# Altium PCB PCB1_8.5_short - Assm.PcbDoc
Units mm, origin at the board's own origin, x right, y up, seen from the top; angles counter-clockwise.
Board outline 3.5 x 25.31 mm, 4 copper layers (Top Layer, fs, Layer 2, Bottom Layer), stack 0.603 mm thick; 6 components, 4 nets, 24 pads, 21 vias.
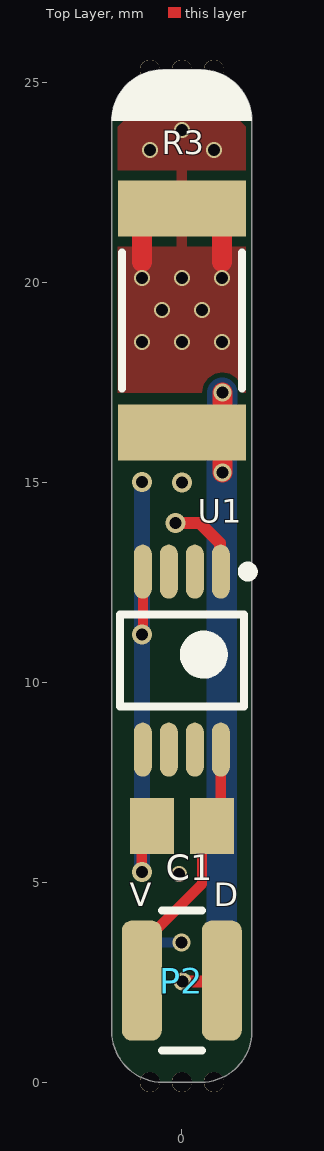
[diagram p0: Top Layer view]
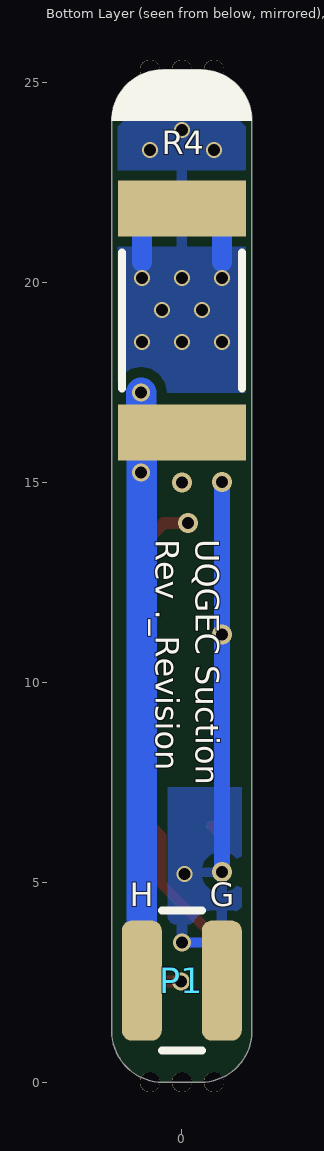
[diagram p1: Bottom Layer view, seen from below]
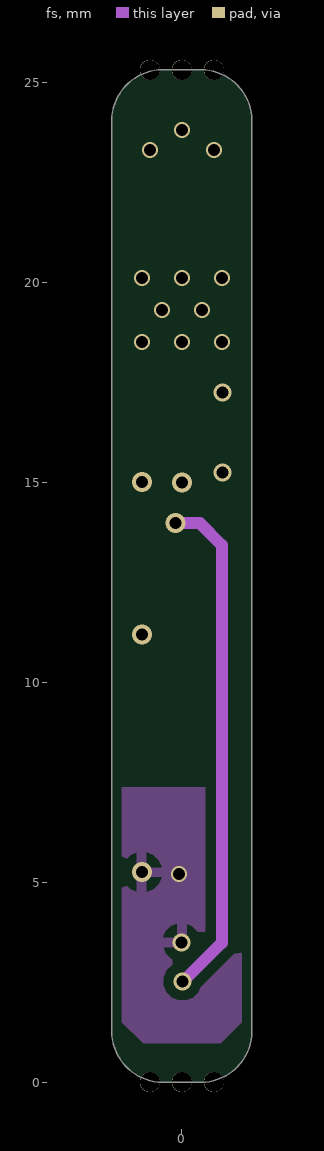
[diagram p2: fs]
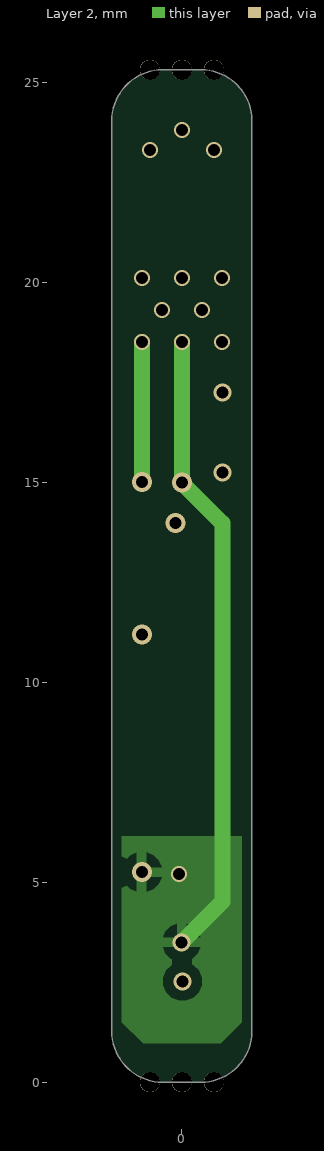
[diagram p3: Layer 2]

## Layer stack, top to bottom
Top Solder: solder mask 0.0102, Solder Resist, Dk 3.5
Top Layer: signal copper 0.0356
Dielectric 2: prepreg 0.0711, PP-006, Dk 4.1
fs: signal copper 0.035
Dielectric 1: dielectric 0.32, FR-4, Dk 4.8
Layer 2: signal copper 0.035
Dielectric 3: prepreg 0.0711, PP-006, Dk 4.1
Bottom Layer: signal copper 0.0356
Bottom Solder: solder mask 0.0102, Solder Resist, Dk 3.5

## Board outline
-0.48,0 cw(c-0.48,1.27) -1.75,1.27 -1.75,24.04 cw(c-0.48,24.04) -0.48,25.31 0.48,25.31 cw(c0.48,24.04) 1.75,24.04 1.75,1.27 cw(c0.48,1.27) 0.48,0

## Design rules (kind name [scope] priority, off if disabled: settings)
Clearance [All] p1: gap=0.254 ignorepadtopadclearanceinfootprint=FALSE except(0: Arc-Hole Track-Hole SMDPad-Hole THPad-Hole Via-Hole Fill-Hole Poly-Hole Region-Hole Text-Hole)
PolygonConnect [All] p1: connectstyle=Relief reliefconductorwidth=0.254 reliefentries=4 polygonreliefangle="90 Angle" airgapwidth=0.254
RoutingVias [All] p1: holewidth=0.711 width=1.27 viastyle="Through Hole" minholewidth=0.711 minwidth=1.27 maxholewidth=0.711 maxwidth=1.27
SolderMaskExpansion [All] p1: expansion=0.102 istentingtop=FALSE
Width [All] p1: maxlimit=0.5 minlimit=0.254 preferedwidth=0.254
30 further rules are at their usual default settings.

## Components (designator, comment, footprint, x,y, rotation, side; value= is the part's Value field where it differs from the comment)
C1 "1u" C0805 0.003,6.4 r0 top
P1 "Header 2" HDR1X2-SMT 0,2.54 r0 bottom
P2 "Header 2" HDR1X2-SMT 0,2.54 r0 top
R3 "15" RES-2512-6332 0,19.04 r90 top
R4 "15" RES-2512-6332 0,19.04 r90 bottom
U1 "DS18B20U" MSSOP-8 0,10.54 r270 top

## Footprints (in the part's own frame and the unit in brackets; to place one, negate y for a bottom-side part, rotate by r counter-clockwise, add the part's x,y. Pads: shape width x height; smd on the part's side, far side on the other; paste and mask are expansions set on the pad)
C0805 [mm] "Chip Capacitor, Body 2.0x1.3mm, IPC High Density"
  rect 1.1x1.4 smd: 1(-0.75,0) 2(0.75,0)
  body extent -1.1,-0.72 1.1,0.72, height 1.4
HDR1X2-SMT [mm] "Connector; Header; 2 Position"
  rrect50% 1x3 smd: 1(-1,0) 2(1,0)
  silkscreen extent -0.5,-1.75 0.5,1.75
MSSOP-8 [mm] "TSOP, 8-Leads, Body 3.00x3.00mm, Pitch 0.65mm, IPC Medium Density"
  oval 1.35x0.45 smd: 1(-2.225,0.975) 2(-2.225,0.325) 3(-2.225,-0.325) 4(-2.225,-0.975) 5(2.225,-0.975) 6(2.225,-0.325) 7(2.225,0.325) 8(2.225,0.975)
  silkscreen extent -2.35,-1.55 1.15,1.78, body extent -2.45,-1.55 2.45,1.55, height 1.1
RES-2512-6332 [mm]
  rect 1.4x3.2 smd: 1(-2.8,0) 2(2.8,0)
  silkscreen extent -1.7,-1.5 1.7,1.5, body extent -3.15,-1.6 3.15,1.6, height 0.6

## Part data
C1: library part Cap, "Capacitor", Link=https://au.mouser.com/ProductDetail/Vishay-Vitramon/VJ1206Y105MXJTW1BC?qs=sGAEpiMZZMs0AnBnWHyRQHefeAIkSpb%2FMIV0RdtEp0g%3D
P1 P2: "Header, 2-Pin", LatestRevisionDate=17-Jul-2002, LatestRevisionNote="Re-released for DXP Platform.", Publisher="Altium Limited"
R3 R4: library part Res3, "Resistor", Link=https://au.mouser.com/ProductDetail/Bourns/CRM2010-FX-51R0ELF?qs=%2FxfeZyN5VBcgDrGLY%2FOOpg%3D%3D, PackageReference=R2512
U1: "Programmable Resolution 1-Wire Digital Thermometer", Link=https://au.mouser.com/ProductDetail/Maxim-Integrated/DS18B20U%2bTR?qs=sGAEpiMZZMvbyeSUH4qH%2FCjwslw0Uk0S

## Free pads (board coordinates)
  round 0.5 hole 0.5 unplated mask+0: 65(-0.8,0) 66(0,0) 67(0.8,0) 68(-0.8,25.31) 69(0,25.31) 70(0.8,25.31)

## Via types
v1: diameter 0.4/0.4/0.4/0.4 (per signal layer), hole 0.3, Top Layer to Bottom Layer, tented both sides, 11 vias
v2: diameter 0.5, hole 0.3, Top Layer to Bottom Layer, tented both sides, 5 vias
v3: diameter 0.45, hole 0.3, Top Layer to Bottom Layer, tented both sides, 4 vias
v4: diameter 0.4, hole 0.3, Top Layer to Bottom Layer, tented both sides, 1 vias

## Nets (pads, with @x,y where several pads share a name; then routed paths per layer and width w, separated by ;. In a path a pad name is that pad's centre, name@x,y a point inside that pad or via, vN(x,y) a via of type N, cw(c..) or ccw(c..) an arc to the next point about the centre after c; other vN are vias at no path point)
Data: P2.2 U1.1 | length 15.7
  Top Layer w0.3: v2(-0.161,13.974) 0.455,13.974 0.954,13.476 0.954,12.786 U1.1 ; v3(0.018,2.522) P2.2@0.982,2.522
  fs w0.3: v2@-0.153,13.967 v2(-0.161,13.974) 0.455,13.974 1.002,13.428 1.002,3.486 v3@0.038,2.522
GND: C1.1 P1.1 R3.2 R4.2 U1.4 | length 41.9
  Top Layer w0.254: v2(-1,5.253) -1,6.147 C1.1 ; U1.4 -0.971,12.761 v2@-0.971,11.194
  Top Layer w0.5: -1,20.5 R3.2@-1,21.39 ; R3.2@-0.996,21.39 R3.2@-1,21.39 ; 1,20.5 1,21.39 0.55,21.84 R3.2 -0.55,21.84 R3.2@-1,21.39
  Layer 2 w0.4: v2@-1,15.025 v1(-1,18.5) ; v3(-0.004,3.496) 1.017,4.517 1.017,13.974 v2(0,14.991) v1(0,18.5)
  Bottom Layer w0.254: P1.1 -1,3.132 -0.636,3.496 v3(-0.004,3.496)
  Bottom Layer w0.4: v2(-1,5.253) v2(-1,15)
  Bottom Layer w0.5: -1,20.5 -1,21.39 -0.55,21.84 R4.2 0.55,21.84 1,21.39 1,20.5
  other v1: 1,18.5 -0.5,19.3 0.5,19.3 -1,20.1 0,20.1 1,20.1 -0.8,23.3 0.8,23.3 0,23.8
  other v2: -1,11.194
  other v4: -0.073,5.2
Heat: P1.2 R3.1 R4.1 | length 15.6
  Top Layer w0.5: R3.1@1,16.69 1.016,16.69 v3(1.016,17.24) ; v3(1.017,15.241) R3.1@1.017,15.79
  Bottom Layer w0.762: P1.2 v3@1,15.225 ; v3@1,15.24 R4.1@1,16.14 ; R4.1@1,16.34 1.016,16.356 v3(1.016,17.24)
Vdd: C1.2 P2.1 U1.8 | length 6.6
  Top Layer w0.254: P2.1 -1,3.473 -0.636,3.837 -0.614,3.837 0.508,4.959 0.508,6.156 C1.2 0.975,6.622 U1.8
pads on no net: U1.2 U1.3 U1.5 U1.6 U1.7

## Polygon pours and split planes (outlines as drawn)
GND on Bottom Layer "GND_L04_P005" (solid, remove dead copper, pour order 5): -1.6,17.24 -1.6,23.889 -1.249,24.24 1.249,24.24 1.6,23.889 1.6,17.24
GND on Bottom Layer "GND_L04_P003" (solid, remove dead copper, pour order 3): -1.5,3.132 1,3.132 1,7.373 -1.5,7.373
GND on Layer 2 "GND_L03_P004" (solid, pour order 4): -1.5,1.5 -0.97,0.97 0.97,0.97 1.5,1.5 1.5,6.147 -1.5,6.147
GND on Top Layer "GND_L01_P002" (solid, remove dead copper, pour order 2): -1.6,17.24 -1.6,23.889 -1.249,24.24 1.249,24.24 1.6,23.889 1.6,17.24
GND on fs "GND_L02_P006" (solid, pour order 6): -1.5,1.5 -0.97,0.97 0.97,0.97 1.5,1.5 1.5,7.373 -1.5,7.373

## Silkscreen, mask and mechanical layers (free items; w line width, h text height)
Top Overlay:
  region: -1.75,24.04 cw(c-0.48,24.04) -0.48,25.31 0.48,25.31 cw(c0.48,24.04) 1.75,24.04
  text "V" at -1.3,4.2 h1
  text "D" at 0.8,4.2 h1
Bottom Overlay:
  region: -1.75,24.04 cw(c-0.48,24.04) -0.48,25.31 0.48,25.31 cw(c0.48,24.04) 1.75,24.04
  text "UQGEC Suction / Rev ._Revision" at 0.85,13.579 h1 r90
  text "G" at -0.7,4.2 h1
  text "H" at 1.3,4.2 h1
Mechanical 1:
  the board outline again, w0.1
Drill Drawing:
  the board outline again, w0.1

## Dimensions
0,19.04 to 0,10.54 on Drill Drawing